# Altium PCB Dice.PcbDoc
Units mil, origin at the board's own origin, x right, y up, seen from the top; angles counter-clockwise.
Board outline 1000 x 1000 mil, 2 copper layers (Top, Bottom), stack 61.7 mil thick; 14 components, 11 nets, 36 pads, 12 vias.
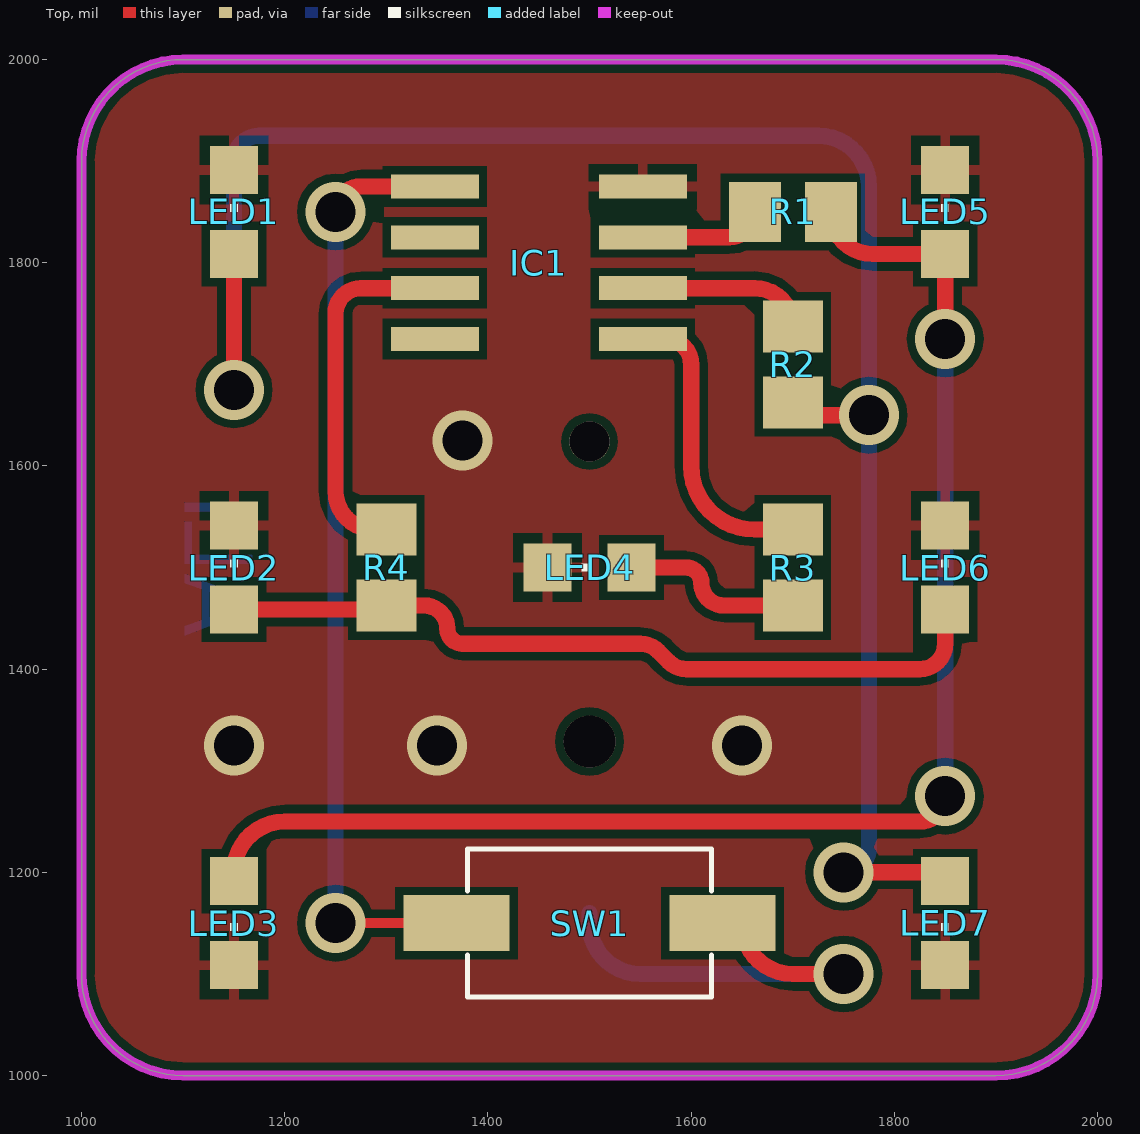
[diagram p0: Top view]
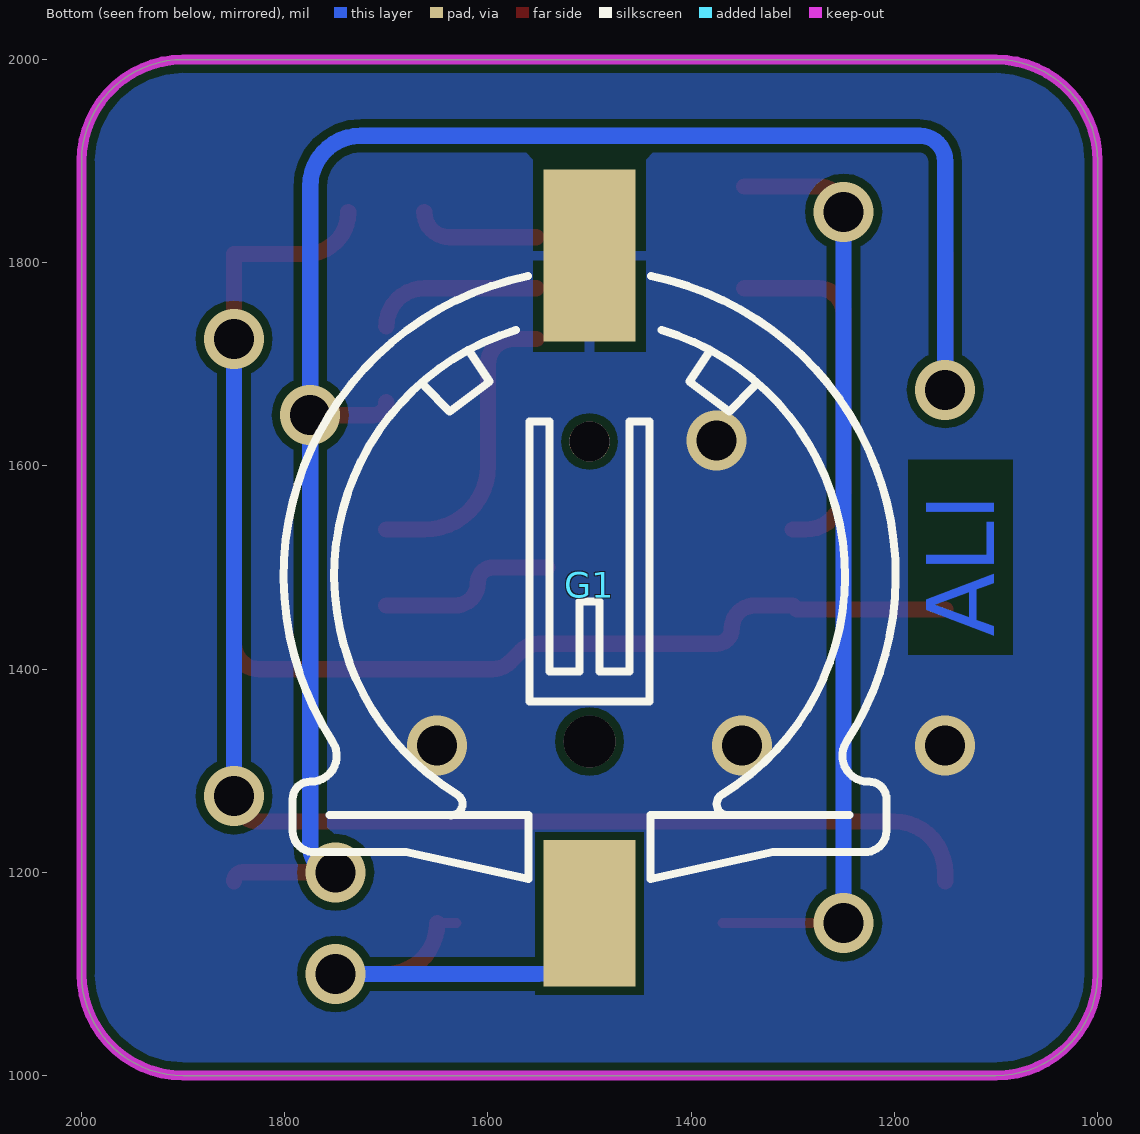
[diagram p1: Bottom view, seen from below]

## Layer stack, top to bottom
Top Solder: solder mask 0.4, Solder Resist, Dk 3.5
Top: signal copper 1.4
Dielectric 1: core 58.9, FR-4, Dk 4.8
Bottom: signal copper 1.4
Bottom Solder: solder mask 0.4, Solder Resist, Dk 3.5

## Board outline
1000,1100 1000,1900 cw(c1100,1900) 1100,2000 1900,2000 cw(c1900,1900) 2000,1900 2000,1100 cw(c1900,1100) 1900,1000 1100,1000 cw(c1100,1100)

## Design rules (kind name [scope] priority, off if disabled: settings)
Clearance [All] p1: gap=8
HoleSize [All] p1: absolutevalues=TRUE maxlimit=1000 minlimit=24 maxpercent=80.000 minpercent=20.000
HoleToHoleClearance mdViaViaSameLayer [All] p1: gap=8 allowstackedmicrovias=TRUE
HoleToHoleClearance [All] p2: gap=10 allowstackedmicrovias=TRUE
PolygonConnect ThermalVias [IsVia] p1: connectstyle=Direct reliefconductorwidth=10 reliefentries=4 polygonreliefangle="90 Angle" airgapwidth=10
PolygonConnect [All] p2: connectstyle=Relief reliefconductorwidth=10 reliefentries=4 polygonreliefangle="90 Angle" airgapwidth=10
RoutingVias [All] p1: holewidth=28 width=50 viastyle="Through Hole" minholewidth=28 minwidth=50 maxholewidth=28 maxwidth=50
SilkToSilkClearance [All] p1 off: silktosilkclearance=10
SilkToSolderMaskClearance [IsPad] p1 off: minsilkscreentomaskgap=10 clearancetoexposedcopper=TRUE
SolderMaskExpansion [All] p1: expansion=3
Width [All] p1: maxlimit=100 minlimit=10 preferedwidth=10
26 further rules are at their usual default settings.

## Components (designator, comment, footprint, x,y, rotation, side; value= is the part's Value field where it differs from the comment)
G1 "" CH291-1220LF 1500,1250 r180 bottom
IC1 "" SO-08 1450,1800 r270 top
LED1 "" CHIPLED_0805 1150,1850 r0 top
LED2 "" CHIPLED_0805 1150,1500 r0 top
LED3 "" CHIPLED_0805 1150,1150 r180 top
LED4 "" CHIPLED_0805 1500,1500 r90 top
LED5 "" CHIPLED_0805 1850,1850 r0 top
LED6 "" CHIPLED_0805 1850,1500 r0 top
LED7 "" CHIPLED_0805 1850,1150 r180 top
R1 "" R0805 1700,1850 r0 top
R2 "" R0805 1700,1700 r270 top
R3 "" R0805 1700,1500 r270 top
R4 "" R0805 1300,1500 r270 top
SW1 "" SW2-4.0-6.0X3.0X2.5MM 1500,1150 r180 top

## Footprints (in the part's own frame and the unit in brackets; to place one, negate y for a bottom-side part, rotate by r counter-clockwise, add the part's x,y. Pads: shape width x height; smd on the part's side, far side on the other; paste and mask are expansions set on the pad)
CH291-1220LF [mm] "CH291-1220LF"
  round 1.3 hole 1.3: 1(0,2)
  round 1 hole 1: 1(0,9.5)
  rect 2.3x3.66 smd: +(0,-2.295)
  rect 2.3x4.3 smd: -(0,14.146)
  silkscreen extent -7.65,-1.44 7.65,13.64
CHIPLED_0805 [mil] "CHIPLED_0805"
  rect 47.24x47.24 smd: A(0,-41.34) C(0,41.34)
  silkscreen extent -4,0 4,8
R0805 [mil] "R0805"
  rect 51.18x59.06 smd: 1(-37.4,0) 2(37.4,0)
SO-08 [mil] "SO-08"
  rect 23.62x86.61 smd: 1(-75,-102.36) 2(-25,-102.36) 3(25,-102.36) 4(75,-102.36) 5(75,102.36) 6(25,102.36) 7(-25,102.36) 8(-75,102.36)
SW2-4.0-6.0X3.0X2.5MM [mm] "SW2-4.0-6.0X3.0X2.5MM"
  rect 2.65x1.4 smd: 1(-3.325,0) 2(3.325,0)
  silkscreen extent -3.05,-1.85 3.05,1.85

## Part data
G1: library part CH291-1220LF
IC1: library part SO-08
LED1 LED2 LED3 LED4 LED5 LED6 LED7: library part CHIPLED_0805
R1 R2 R3 R4: library part R0805
SW1: library part SW2-4.0-6.0X3.0X2.5MM

## Via types
v1: diameter 59.05/59.05 (per signal layer), hole 39.37, Top to Bottom, 12 vias

## Nets (pads, with @x,y where several pads share a name; then routed paths per layer and width w, separated by ;. In a path a pad name is that pad's centre, name@x,y a point inside that pad or via, vN(x,y) a via of type N, cw(c..) or ccw(c..) an arc to the next point about the centre after c; other vN are vias at no path point)
GND: G1.- IC1.8 LED1.C LED2.C LED3.C LED4.C LED5.C LED6.C LED7.C
  other v1: 1150,1325 1350,1325 1650,1325 1375,1625
N$1: IC1.1 SW1.2 | length 931
  Top w10: v1(1250,1150) SW1.2
  Top w16: v1(1250,1850) cw(c1275,1850) 1275,1875 IC1.1
  Bottom w16: v1(1250,1150) v1(1250,1850)
N$2: IC1.7 R1.1 | length 124.5
  Top w16: IC1.7 1637.6,1825 ccw(c1637.6,1850) R1.1
N$3: IC1.6 R2.1 | length 169.1
  Top w16: IC1.6 1662.4,1775 cw(c1662.4,1737.4) R2.1
N$4: IC1.5 R3.1 | length 297.6
  Top w16: IC1.5 1575,1725 cw(c1575,1700) 1600,1700 1600,1600 ccw(c1662.6,1600) 1662.6,1537.4 R3.1
N$5: IC1.3 R4.1 | length 358.4
  Top w16: R4.1 1287.6,1537.4 cw(c1287.6,1575) 1250,1575 1250,1750 cw(c1275,1750) 1275,1775 IC1.3
N$6: LED3.A LED5.A R1.2 | length 1421.3
  Top w16: LED3.A 1150,1200 cw(c1200,1200) 1200,1250 1825,1250 ccw(c1825,1275) v1(1850,1275) ; R1.2 ccw(c1778.74,1850) 1778.74,1808.66 LED5.A v1(1850,1725)
  Bottom w16: v1(1850,1275) v1(1850,1725)
N$7: LED1.A LED7.A R2.2 | length 1942.5
  Top w10: R2.2 ccw(c1712.6,1662.6) 1712.6,1650 cw(c1712.6,1662.6) R2.2
  Top w16: v1(1150,1675) LED1.A ; R2.2 ccw(c1712.6,1662.6) 1712.6,1650 v1(1775,1650) ; v1(1750,1200) 1841.34,1200 cw(c1841.34,1191.34) LED7.A
  Bottom w16: v1(1150,1675) 1150,1900 cw(c1175,1900) 1175,1925 1725,1925 cw(c1725,1875) 1775,1875 v1(1775,1650) 1775,1225 cw(c1750,1225) v1(1750,1200)
N$11: LED4.A R3.2 | length 180
  Top w16: LED4.A 1595,1500 cw(c1595,1485) 1610,1485 ccw(c1632.4,1485) 1632.4,1462.6 R3.2
N$12: LED2.A LED6.A R4.2 | length 787.9
  Top w10: LED6.A@1850,1450 LED6.A
  Top w16: LED2.A 1296.06,1458.66 R4.2 1337.4,1462.6 cw(c1337.4,1440) 1360,1440 ccw(c1375,1440) 1375,1425 1550,1425 cw(c1550,1400) 1567.68,1417.68 1578.03,1407.32 ccw(c1595.71,1425) 1595.71,1400 1825,1400 ccw(c1825,1425) 1850,1425 LED6.A
VCC: G1.+ SW1.1 | length 435.8
  Top w10: SW1.1 SW1.1@1650,1150
  Top w16: SW1.1@1650,1150 ccw(c1700,1150) 1700,1100 v1(1750,1100)
  Bottom w16: G1.+ 1500,1150 ccw(c1550,1150) 1550,1100 v1(1750,1100)
pads on no net: G1.1 IC1.2 IC1.4

## Polygon pours and split planes (outlines as drawn)
GND on Top "GND1" (solid, remove dead copper, pour order 0): 1000,1900 cw(c1100,1900) 1100,2000 1900,2000 cw(c1900,1900) 2000,1900 2000,1100 cw(c1900,1100) 1900,1000 1100,1000 cw(c1100,1100) 1000,1100
GND on Bottom "GND2" (solid, remove dead copper, pour order 2): 1000,1900 cw(c1100,1900) 1100,2000 1900,2000 cw(c1900,1900) 2000,1900 2000,1100 cw(c1900,1100) 1900,1000 1100,1000 cw(c1100,1100) 1000,1100

## Keep-outs
Keep-Out Layer:
  the board outline again, w10

## Other copper
Bottom:
  text "ALI" at 1101.59,1431.98 h66.93 r270

## Silkscreen, mask and mechanical layers (free items; w line width, h text height)
Dimension:
  the board outline again, w10
Unrouted:
  lines w0: 1850,1541.34 1858.66,1541.34

## Text inside footprints (layer, text, board x,y; h text height)
IC1: Document "IPC SO8" at 1425,1875 h24.8 r270; Document "JEDEC MS-012 AA" at 1464.37,1875 h18.6 r270